# Altium PCB respi.PcbDoc
Units mil, origin at the board's own origin, x right, y up, seen from the top; angles counter-clockwise.
Board outline 1180 x 1154 mil, 2 copper layers (Top Layer, Bottom Layer); 15 components, 11 nets, 48 pads, 0 vias.
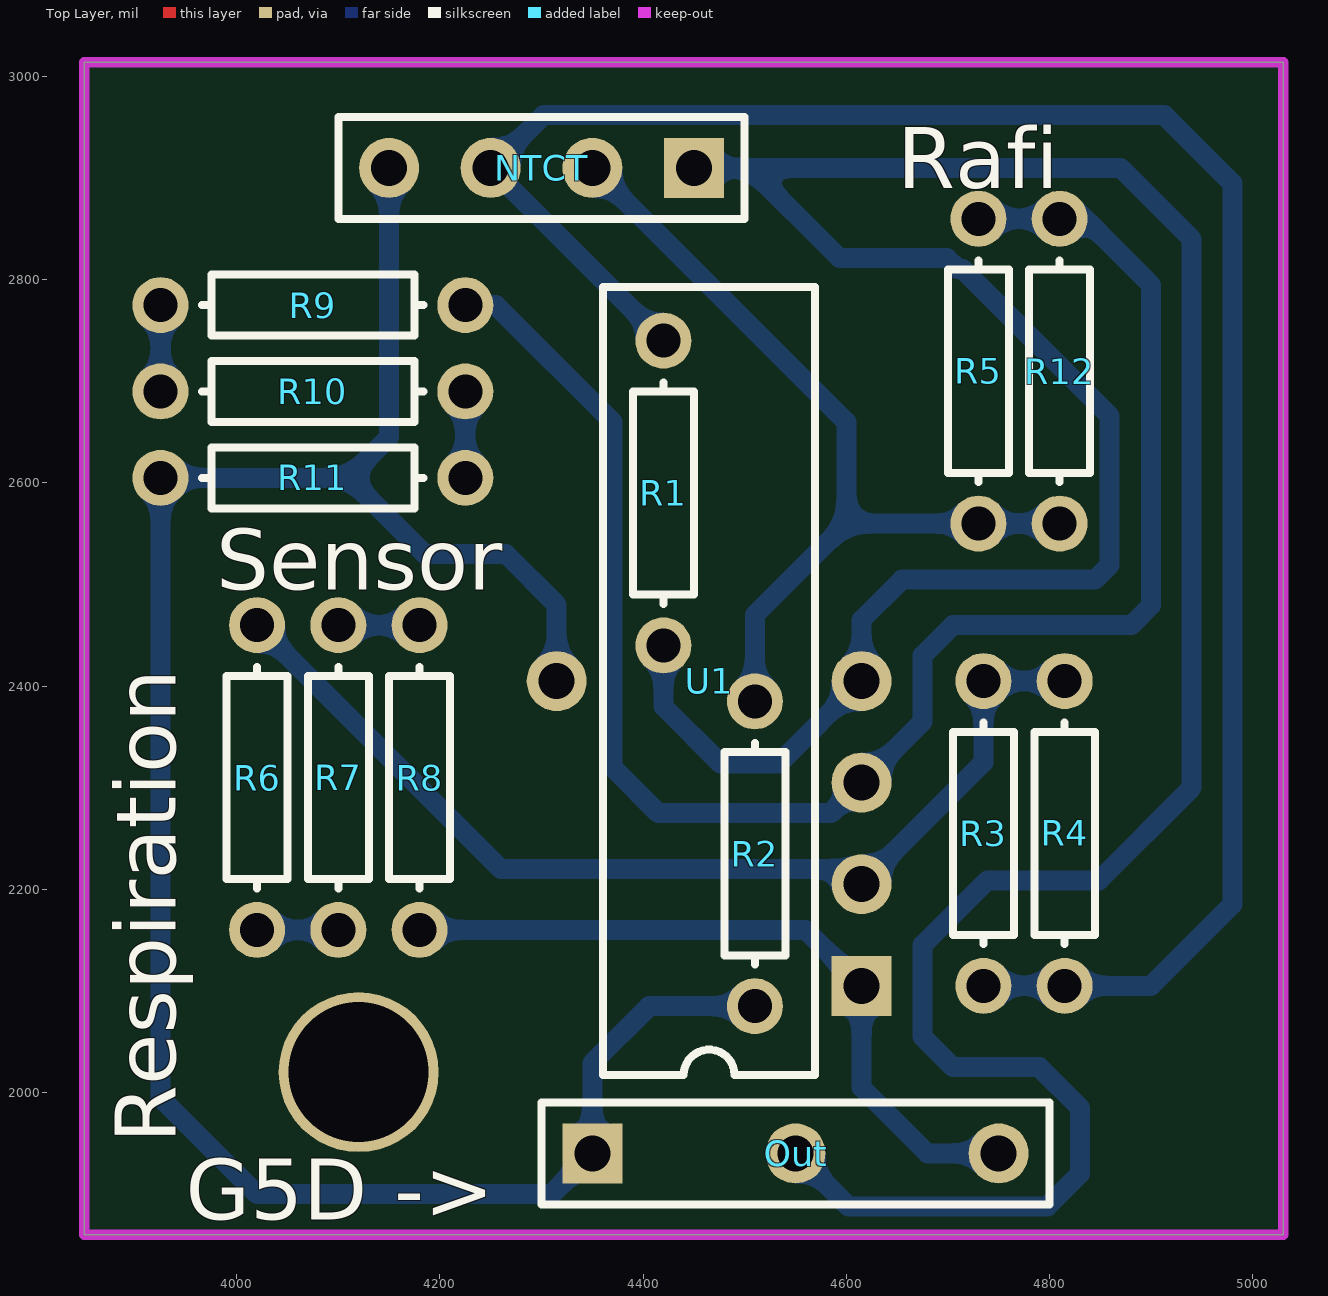
[diagram p0: Top Layer view]
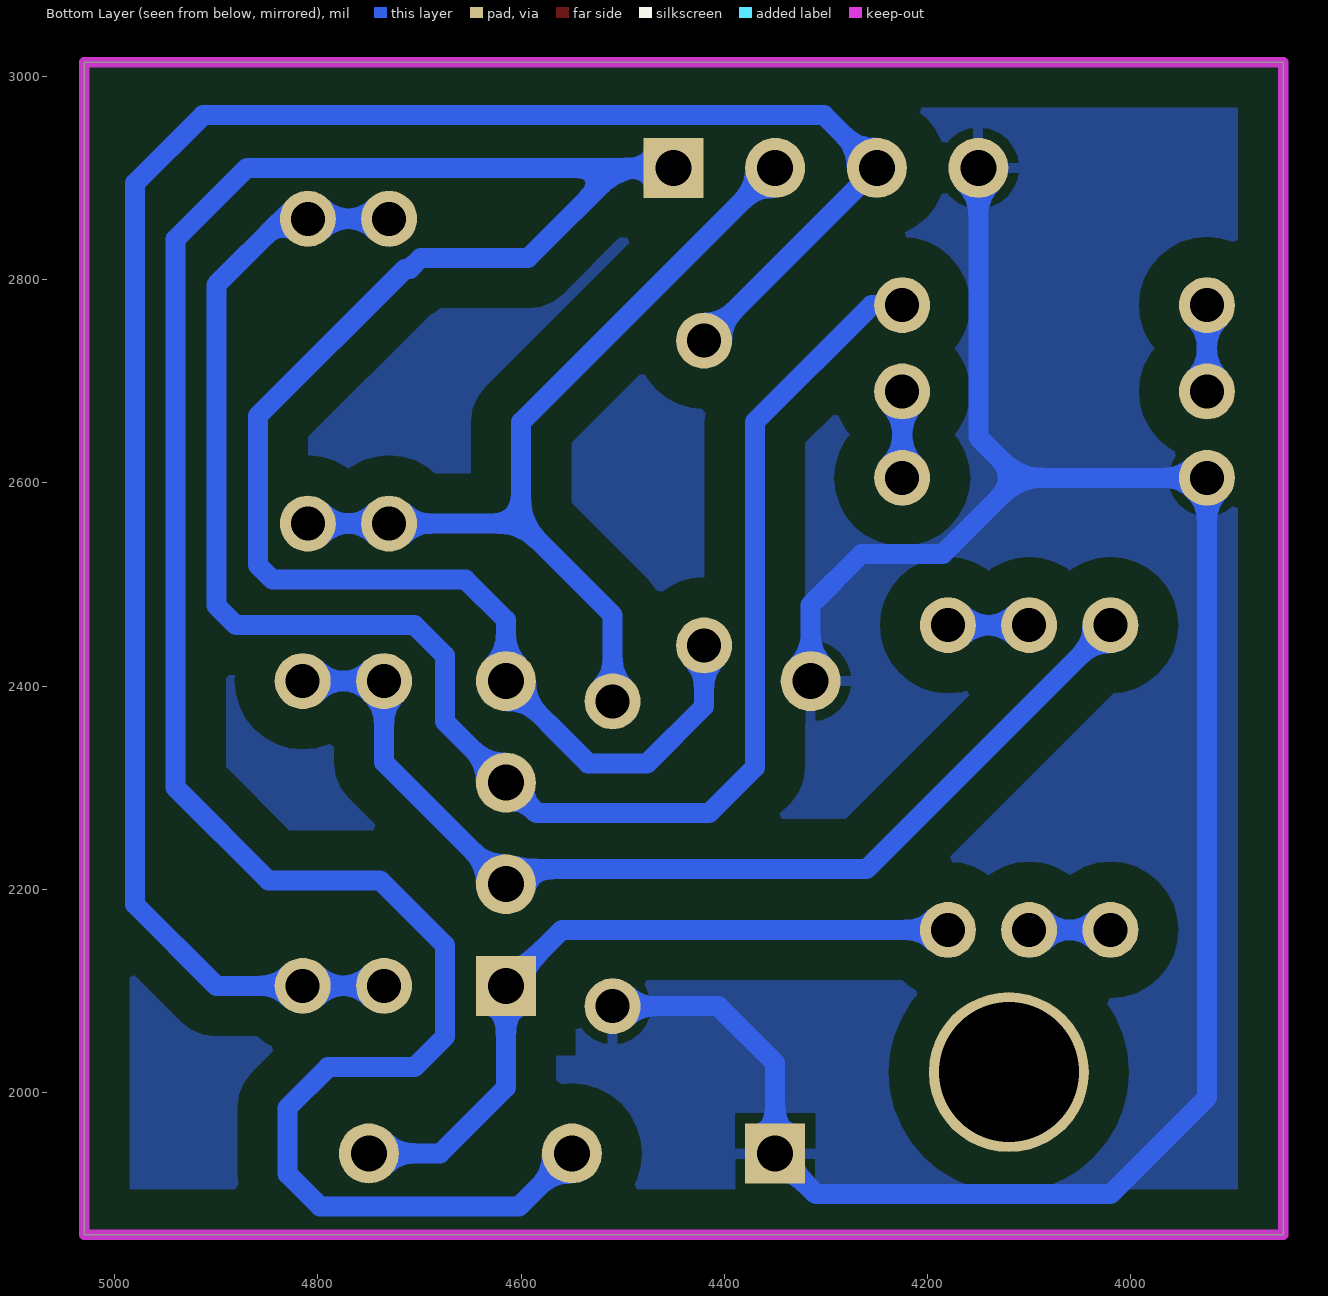
[diagram p1: Bottom Layer view, seen from below]

## Layer stack, top to bottom
Top Solder: solder mask 0.4, Solder Resist, Dk 3.5
Top Layer: signal copper 1.4
Dielectric 1: dielectric 12.6, FR-4, Dk 4.8
Bottom Layer: signal copper 1.4
Bottom Solder: solder mask 0.4, Solder Resist, Dk 3.5

## Board outline
3850,1860 3850,3014 5030,3014 5030,1860

## Design rules (kind name [scope] priority, off if disabled: settings)
Clearance [All] p1: gap=0.01
PolygonConnect [All] p1: connectstyle=Relief reliefconductorwidth=10 reliefentries=4 polygonreliefangle="90 Angle" airgapwidth=10
RoutingVias [All] p1: holewidth=28 width=50 viastyle="Through Hole" minholewidth=28 minwidth=50 maxholewidth=28 maxwidth=50
SolderMaskExpansion [All] p1: expansion=4
Width [All] p1: maxlimit=27.56 minlimit=11.81 preferedwidth=19.68
30 further rules are at their usual default settings.

## Components (designator, comment, footprint, x,y, rotation, side; value= is the part's Value field where it differs from the comment)
NTCT "Header 4" HDR1X4 4450,2910 r180 top
Out "Header 5" HDR1X5 4350,1940 r0 top
R1 "10K" AXIAL-0.3 4420,2590 r270 top
R2 "10K" AXIAL-0.3 4510,2235 r270 top
R3 "10" AXIAL-0.3 4735,2255 r90 top
R4 "10" AXIAL-0.3 4815,2255 r90 top
R5 "10" AXIAL-0.3 4730,2710 r90 top
R6 "10K" AXIAL-0.3 4020,2310 r270 top
R7 "10K" AXIAL-0.3 4100,2310 r90 top
R8 "10K" AXIAL-0.3 4180,2310 r270 top
R9 "10K" AXIAL-0.3 4075,2775 r180 top
R10 "10K" AXIAL-0.3 4075,2690 r0 top
R11 "10K" AXIAL-0.3 4075,2605 r180 top
R12 "10" AXIAL-0.3 4810,2710 r90 top
U1 "TL074N" N014 4465,2405 r90 top

## Footprints (in the part's own frame and the unit in brackets; to place one, negate y for a bottom-side part, rotate by r counter-clockwise, add the part's x,y. Pads: shape width x height; smd on the part's side, far side on the other; paste and mask are expansions set on the pad)
AXIAL-0.3 [mm] "Axial Device, Thru-Hole; 2 Leads; 0.3 in Pin Spacing"
  round 1.4 hole 0.85: 1(-3.81,0) 2(3.81,0)
  silkscreen extent -2.77,-0.76 2.77,0.76
HDR1X4 [mm] "Connector; Header; 4 Position"
  rect 1.5x1.5 hole 0.9: 1(0,0)
  round 1.5 hole 0.9: 2(2.54,0) 3(5.08,0) 4(7.62,0)
  silkscreen extent -1.27,-1.27 8.89,1.27
HDR1X5 [mm] "Connector; Header; 5 Position"
  rect 1.5x1.5 hole 0.9: 1(0,0)
  round 0 all layers, no hole: 2(2.54,0) 4(7.62,0)
  round 1.5 hole 0.9: 3(5.08,0) 5(10.16,0)
  silkscreen extent -1.27,-1.27 11.43,1.27
N014 [mm] "DIP; 14 Leads; Row Spacing 7.62 mm; Pitch 2.54 mm"
  rect 1.5x1.5 hole 0.9: 1(-7.62,-3.81)
  round 1.5 hole 0.9: 2(-5.08,-3.81) 3(-2.54,-3.81) 4(0,-3.81) 11(0,3.81)
  round 0 all layers, no hole: 5(2.54,-3.81) 6(5.08,-3.81) 7(7.62,-3.81) 8(7.62,3.81) 9(5.08,3.81) 10(2.54,3.81) 12(-2.54,3.81) 13(-5.08,3.81) 14(-7.62,3.81)
  silkscreen extent -9.85,-2.65 9.85,2.65

## Part data
NTCT: "Header, 4-Pin"
Out: "Header, 5-Pin"
R1 R2 R3 R4 R5 R6 R7 R8 R9 R10 R11 R12: library part Res1, "Resistor"
U1: "Low-Noise JFET-Input Operational Amplifier"

## Free pads (board coordinates)
  round 157.48 hole 137.8: 8(4120,2020)

## Nets (pads, with @x,y where several pads share a name; then routed paths per layer and width w, separated by ;. In a path a pad name is that pad's centre, name@x,y a point inside that pad or via, vN(x,y) a via of type N, cw(c..) or ccw(c..) an arc to the next point about the centre after c; other vN are vias at no path point)
GND: NTCT.4 Out.1 R2.2 R11.2 U1.11 | length 2198.5
  Bottom Layer w19.68: R11.2 4110,2605 ; R11.2@3930,2600 3925,2595 3925,1995 4020,1900 4310,1900 Out.1 4350,2029 4406,2085 R2.2 ; NTCT.4 4150,2645 4110,2605 ; U1.11 4315,2480 4265,2530 4185,2530 4110,2605
NetNTCT_2: NTCT.2 R2.1 R5.1 R12.1 | length 875.8
  Bottom Layer w19.68: NTCT.2 4600,2660 4600,2560 ; R2.1 4510,2470 4600,2560 ; R12.1 4600,2560
NetNTCT_3: NTCT.3 R1.1 R3.1 R4.1 | length 2087.8
  Bottom Layer w19.68: R1.1 NTCT.3 4302,2962 4913,2962 4980,2895 4980,2185 4900,2105 R3.1 R4.1
NetOut_5: Out.5 R8.2 U1.1 | length 719.7
  Bottom Layer w19.68: R8.2 4560,2160 U1.1 4615,2005 4680,1940 Out.5
NetR3_2: R3.2 R4.2 R6.1 U1.2 | length 1030.3
  Bottom Layer w19.68: R6.1 4260,2220 4600,2220 U1.2 4735,2325 R3.2 R4.2
NetR5_2: R5.2 R9.1 R12.2 U1.3 | length 1716.6
  Bottom Layer w19.68: R9.1 4255,2775 4370,2660 4370,2320 4415.05,2274.95 4584.95,2274.95 U1.3 4675,2365 4675,2430 4705,2460 4880.71,2460 4900,2479.29 4900,2795 4835,2860 R12.2 R5.2
NetR6_2: R6.2 R7.1 | length 80
  Bottom Layer w19.68: R6.2 R7.1
NetR7_2: R7.2 R8.1 | length 80
  Bottom Layer w19.68: R7.2 R8.1
NetR9_2: R9.2 R10.1 | length 85
  Bottom Layer w19.68: R10.1 R9.2
NetR10_2: R10.2 R11.1 | length 85
  Bottom Layer w19.68: R11.1 R10.2
VCC: NTCT.1 Out.3 R1.2 U1.4 | length 3282.7
  Bottom Layer w19.68: R1.2 4420,2380 4476,2324 4534,2324 U1.4 4615,2465 4655,2505 4845,2505 4859.21,2519.21 4859.21,2665.79 4714.21,2810.79 4709.62,2810.79 4699.06,2821.35 4593.25,2821.35 4504.6,2910 ; NTCT.1 4504.6,2910 ; Out.3 4602,1888 4798,1888 4830,1920 4830,1985 4790,2025 4705,2025 4675,2055 4675,2145 4738.75,2208.75 4848.75,2208.75 4940,2300 4940,2840 4870,2910 4504.6,2910
pads on no net: Out.2 Out.4 U1.5 U1.6 U1.7 U1.8 U1.9 U1.10 U1.12 U1.13 U1.14

## Polygon pours and split planes (outlines as drawn)
GND on Bottom Layer "Bottom Layer-GND" (solid, pour order 15): 3850,3014 5030,3014 5030,1860 3850,1860 3850,3014

## Keep-outs
Keep-Out Layer:
  the board outline again, w10

## Silkscreen, mask and mechanical layers (free items; w line width, h text height)
Top Overlay:
  text "Rafi" at 4650,2890 h60
  text "Sensor" at 3980,2495 h60
  text "Respiration" at 3940,1950 h60 r90
  text "G5D ->" at 3950,1875 h60